# EAGLE board Kaya (EAGLE 8.5.0)
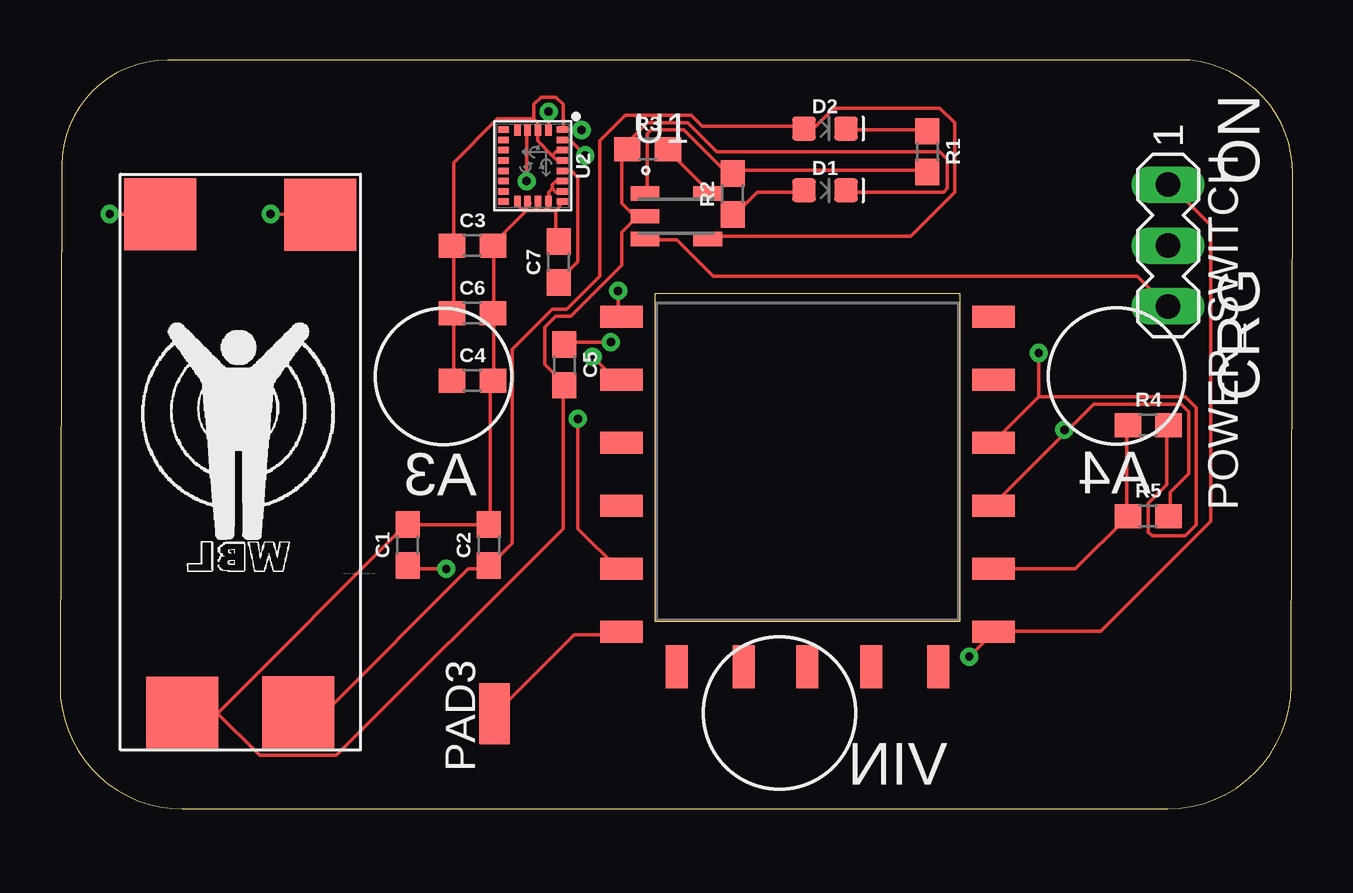
[diagram p0: board, top side]
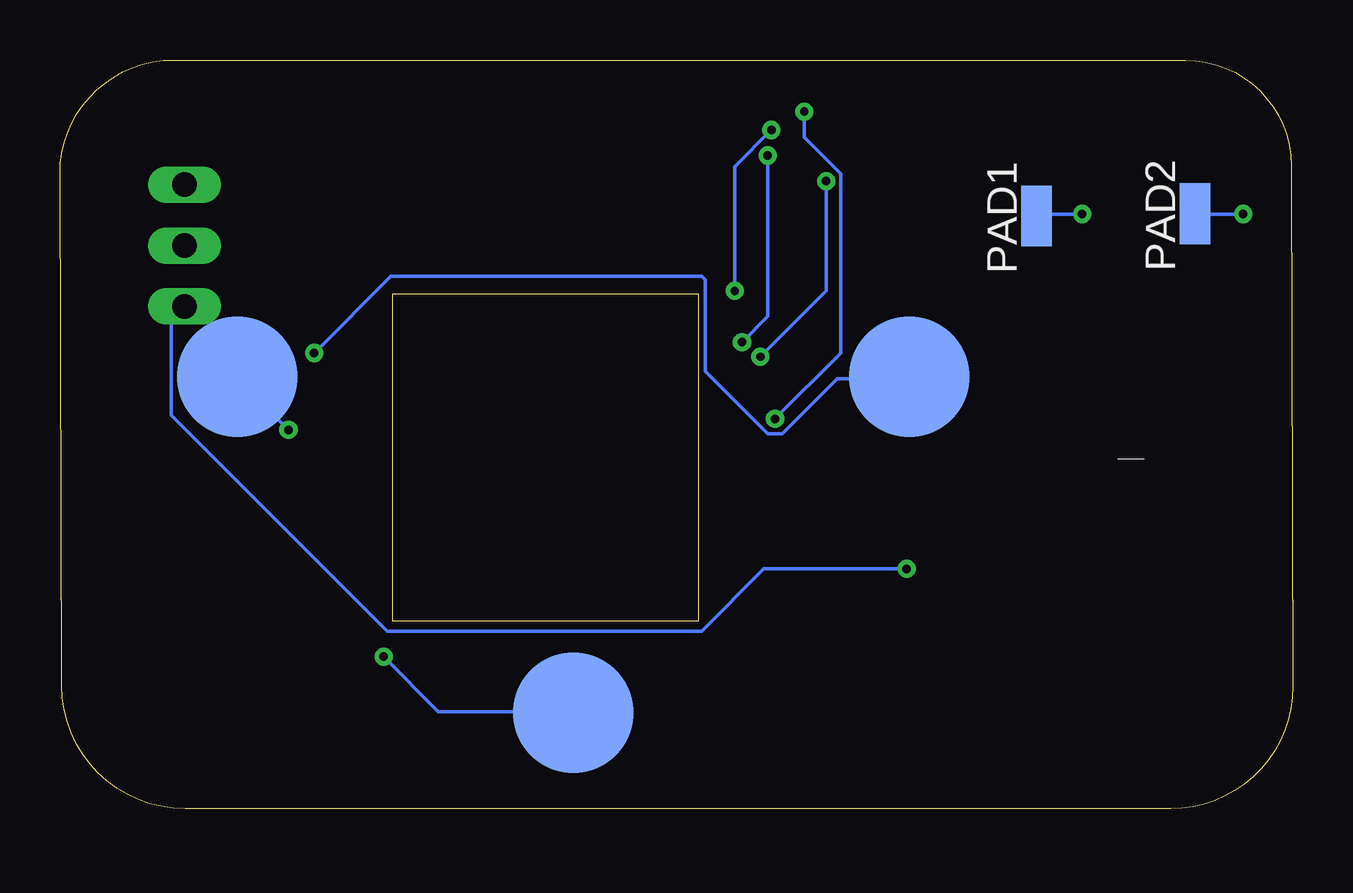
[diagram p1: board, bottom side, seen from below]

Size 51.37 x 31.2 mm. Coordinates in mm from the lower left corner, seen from the top.
Outline: 0.07,26.8 0,5.11 arc90 5.09,0 46.15,0 arc90 51.3,5.13 51.37,26.45 arc90 46.64,31.2 4.48,31.2 arc90 0.07,26.8
Copper layers (1*16): Top 0.035mm / dielectric 1.5mm / Bottom 0.035mm
Design rules "default": minimum track width 6mil, minimum drill 0.35mm, track to track 6mil, track to pad 6mil, pad to pad 6mil, via to via 6mil, smd to smd 6mil, copper to edge 40mil, drill to drill 6mil, minimum pad ring 10mil, minimum via ring 8mil, stop-mask expansion 4mil, vias tented up to drill 0mil, thermal gap 10mil
tKeepout: area 24.6,7.5 to 37.7,22
bKeepout: area 24.6,7.5 to 37.7,22
tRestrict: area 24.6,7.5 to 37.7,22
bRestrict: area 24.6,7.5 to 37.7,22
vRestrict: area 24.6,7.5 to 37.7,22
Milling: area 24.8,7.8 to 37.5,21.5

## Footprints (pad centres in the part's own frame; a part is rotated, then mirrored left to right if it is on the bottom)
0603 = smd 1.1 x 1: 1 -0.85,0; 2 0.85,0
LED-0603 = smd 1 x 1: A -0.877,0; C 0.877,0
SMD1,27-2,54 = smd 1.27 x 2.54: 1 0,0
MA03-1 = drill 1.016 long: 1 -2.54,0; 2 0,0; 3 2.54,0
SOT23-5 = smd 1.2 x 0.6: 1 -1.306,0.95; 2 -1.306,0; 3 -1.306,-0.95; 4 1.306,-0.95; 5 1.306,0.95
LGA-24-3.5X3 = smd 0.27 x 0.45: 1 -1.505,1.225; 6 -1.505,-1.225; 7 -1.075,-1.225; 8 -0.645,-1.225; 9 -0.215,-1.225; 10 0.215,-1.225; 11 0.645,-1.225; 12 1.075,-1.225; 13 1.505,-1.225; 18 1.505,1.225; 19 1.075,1.225; 20 0.645,1.225; 21 0.215,1.225; 22 -0.215,1.225; 23 -0.645,1.225; 24 -1.075,1.225 | smd 0.45 x 0.27: 2 -1.475,0.645; 3 -1.475,0.215; 4 -1.475,-0.215; 5 -1.475,-0.645; 14 1.475,-0.645; 15 1.475,-0.215; 16 1.475,0.215; 17 1.475,0.645
INDUCTIVE-CHARGE-5V = smd 3 x 3: IN_L -3.33,10.33; IN_R 3.33,10.32; OUT+ 2.42,-10.42; OUT- -2.41,-10.43
BLE-NANO-PKG = smd 1.778 x 0.914: A3 7.75,4.375; A4 7.75,1.75; GND$6 -7.75,-3.5; GND$8 7.75,-0.875; RXD -7.75,1.75; SCL -7.75,-0.875; SDA -7.75,7; SWCLK 7.75,9.625; SWDIO 7.75,7; TXD -7.75,4.375; VDD -7.75,9.625; VIN 7.75,-3.5 | smd 0.914 x 1.778: P06 2.65,-4.95; P07 5.45,-4.95; P15 0,-4.95; P28 -5.45,-4.95; P29 -2.65,-4.95
CONDUCTIVE-BUTTON = smd 5 x 5: 1 0,0

## Placement (x,y rotation side)
C1  4.7uF  [0603]  14.49,10.99 90 top
C2  4.7uF  [0603]  17.87,10.99 90 top
C3  10uF  [0603]  17.18,23.46 0 top
C4  0.1uF  [0603]  17.18,17.84 0 top
C5  0.1uF  [0603]  21.01,18.5 270 top
C6  0.1uF  [0603]  17.18,20.65 0 top
C7  10nF  [0603]  20.78,22.78 90 top
D1  GREEN  [LED-0603]  31.87,25.77 0 top
D2  RED  [LED-0603]  31.87,28.34 0 top
PAD1  WIREPADSMD1,27-254  [SMD1,27-2,54]  10.68,24.7 0 bottom
PAD2  WIREPADSMD1,27-254  [SMD1,27-2,54]  4.08,24.8 0 bottom
PAD3  WIREPADSMD1,27-254  [SMD1,27-2,54]  18.11,3.96 0 top
POWER_SWITCH  [MA03-1]  46.17,23.47 270 top
R1  1k  [0603]  36.13,27.38 270 top
R2  1k  [0603]  28.02,25.62 90 top
R3  10k  [0603]  24.48,27.49 0 top
R4  10k  [0603]  45.34,15.99 0 top
R5  10k  [0603]  45.34,12.2 0 top
U1  MCP73832T-2ACI/OT  [SOT23-5]  25.68,24.69 0 top
U2  LSM9DS1  [LGA-24-3.5X3]  19.7,26.8 270 top
U$1  INDUCTIVE-CHARGE-5V  [INDUCTIVE-CHARGE-5V]  7.51,14.44 0 top
U$2  BLE-NANO  [BLE-NANO-PKG]  31.14,10.87 0 top
U$3  CONDUCTIVE-BUTTON  [CONDUCTIVE-BUTTON]  15.98,18 180 bottom
U$4  CONDUCTIVE-BUTTON  [CONDUCTIVE-BUTTON]  43.98,18 0 bottom
U$5  CONDUCTIVE-BUTTON  [CONDUCTIVE-BUTTON]  29.98,4 0 bottom

## Library data of the parts
C1 C2 = SparkFun-Capacitors; PROD_ID: CAP-08280
C3 = SparkFun-Capacitors; PROD_ID: CAP-11015
C4-C6 = SparkFun-Capacitors; PROD_ID: CAP-00810
C7 = SparkFun-Capacitors; PROD_ID: CAP-00867
D1 = SparkFun-LED; PROD_ID: DIO-00821
D2 = SparkFun-LED; PROD_ID: DIO-00819
PAD1-PAD3 = wirepad
POWER_SWITCH = con-lstb; OC_FARNELL: unknown; OC_NEWARK: unknown
R1 R2 = SparkFun-Resistors; PROD_ID: RES-07856
R3-R5 = SparkFun-Resistors; PROD_ID: RES-00824
U1 = MCP73832T-2ACI_OT; AVAILABILITY: Unavailable; MF: Microchip; MP: MCP73832T-2ACI-OT; PACKAGE: SOT-23-5 Microchip; PRICE: None
U2 = SparkFun-Sensors; PROD_ID: IC-12536
U$1 U$3-U$5 = tex-tronics
U$2 = BLE-NANO

## Nets
GND: C1.2 C2.2 C3.2 C4.2 C5.2 C6.2 C7.2 D1.C R3.1 U1.2 U2.14 U2.15 U2.16 U2.17 U2.18 U2.19 U2.20 U$1.OUT-
N$1: R3.2 U1.5
N$2: C2.1 D2.A U1.4 U$1.OUT+
N$3: R4.1 R5.1 U$2.GND$8
N$4: R4.2 U$2.A3 U$3.1
N$5: PAD3.1 U$2.GND$6
N$6: R5.2 U$2.A4 U$4.1
N$7: D2.C R1.1
N$8: R1.2 R2.2 U1.1
N$9: D1.A R2.1
N$10: PAD1.1 U$1.IN_R
N$11: PAD2.1 U$1.IN_L
N$12: C5.1 U2.24
N$14: C7.1 U2.21
N$16: U2.4 U$2.SDA
N$17: U2.2 U$2.SCL
VBAT: C1.1 POWER_SWITCH.3 U1.3
VDD: C3.1 C4.1 C6.1 U2.1 U2.3 U2.22 U2.23 U$2.VDD
VIN: POWER_SWITCH.1 U$2.VIN U$5.1

## Tracks (layer width: path | path; a pad name or v marks a point on that pad's centre or on a via)
GND
  Top 0.152: 24.02,24.63 23.41,24.02 23.41,22.65 21.27,20.51 20.66,20.51 20.21,20.06 20.21,18.53 20.97,17.77 C5.2 20.97,17.62 20.97,11.67 11.52,2.23 8.32,2.23 6.49,4.05 | 24.02,24.63 24.32,24.63 U1.2 24.02,24.63 | D1.C 32.86,25.69 36.82,25.69 36.97,25.85 36.97,27.07 36.67,27.37 27.37,27.37 26.15,28.59 24.47,28.59 23.71,27.83 23.71,27.52 R3.1 23.56,27.37 23.41,27.22 23.41,25.24 24.02,24.63 | 20.51,25.85 20.66,25.69 20.82,25.69 U2.19 | 20.51,25.85 20.51,26 20.66,26.15 20.82,26.15 U2.20 | 19.29,24.93 19.14,25.08 19.14,25.24 U2.14 | 19.29,24.93 19.6,25.24 U2.15 | 19.75,24.93 19.9,25.08 19.9,25.24 U2.16 | 19.29,24.93 19.44,24.93 | 19.44,24.93 19.75,24.93 | 20.21,24.93 20.36,25.08 20.36,25.24 U2.17 20.36,25.39 20.36,25.69 20.51,25.85 | 19.75,24.93 20.21,24.93 | 20.66,24.93 20.82,25.08 20.82,25.24 U2.18 | 20.21,24.93 20.66,24.93 | 19.44,24.93 18.07,23.56 C3.2 18.07,23.41 18.07,20.67 C6.2 18.07,20.51 18.07,17.92 C4.2 17.92,17.77 17.92,11.98 C2.2 17.77,11.83 14.57,11.83 C1.2 14.42,11.83 6.64,4.05 6.49,4.05 | 20.66,24.93 20.66,23.71 C7.2 | 6.49,4.05 5.12,4.05 U$1.OUT- 6.49,4.05
N$1
  Top 0.152: R3.2 25.39,27.37 27.06,25.69 U1.5
N$2
  Top 0.152: U1.4 27.06,23.87 35.45,23.87 37.28,25.69 37.28,28.59 36.67,29.2 32.25,29.2 31.48,28.44 31.03,28.44 D2.A 30.87,28.44 26.76,28.44 26.3,28.89 23.56,28.89 22.49,27.83 22.49,22.19 21.12,20.82 20.51,20.82 18.84,19.14 18.84,11.06 17.92,10.15 C2.1 17.77,10 17.01,10 11.06,4.05 10,4.05 U$1.OUT+
N$3
  Top 0.152: R4.1 44.44,15.94 44.44,12.28 R5.1 44.44,12.13 42.3,10 38.95,10 U$2.GND$8
N$4  (via drill 0.35)
  Top 0.152: 40.78,17.16 46.88,17.16 47.33,16.7 47.33,11.83 46.88,11.37 45.51,11.37 45.35,11.52 45.35,12.74 46.11,13.5 46.11,15.94 R4.2 | 40.78,17.16 38.95,15.33 U$2.A3 | 40.78,17.16 v40.78,18.99
  Bottom 0.152: v40.78,18.99 37.58,22.19 24.63,22.19 24.47,22.04 24.47,18.23 21.88,15.64 21.27,15.64 18.99,17.92 16.09,17.92 U$3.1
N$5
  Top 0.152: U$2.GND$6 23.25,7.25 21.43,7.25 18.23,4.05 PAD3.1
N$6  (via drill 0.35)
  Top 0.152: 42,15.79 38.95,12.74 U$2.A4 | 42,15.79 43.07,16.86 46.72,16.86 47.03,16.55 47.03,13.96 46.27,13.2 46.27,12.28 R5.2 | 42,15.79 v41.85,15.79
  Bottom 0.152: v41.85,15.79 43.98,17.92 U$4.1
N$7
  Top 0.152: D2.C 32.86,28.29 36.06,28.29 R1.1
N$8
  Top 0.152: U1.1 24.47,25.69 24.47,28.13 24.63,28.29 26,28.29 27.67,26.61 27.98,26.61 R2.2 28.13,26.61 36.06,26.61 R1.2
N$9
  Top 0.152: D1.A 30.87,25.69 29.05,25.69 28.13,24.78 R2.1
N$10  (via drill 0.35)
  Top 0.152: v8.78,24.78 10.76,24.78 U$1.IN_R
  Bottom 0.152: v8.78,24.78 10.61,24.78 PAD1.1
N$11  (via drill 0.35)
  Top 0.152: v2.07,24.78 4.05,24.78 U$1.IN_L
  Bottom 0.152: v2.07,24.78 4.05,24.78 PAD2.1
N$12  (via drill 0.35)
  Top 0.152: v21.88,27.22 21.27,27.83 20.97,27.83 U2.24 | v22.95,19.45 21.12,19.45 C5.1
  Bottom 0.152: v21.88,27.22 21.88,20.51 v22.95,19.45
N$14
  Top 0.152: U2.21 20.97,26.61 21.27,26.61 21.58,26.3 21.58,22.8 20.82,22.04 C7.1
N$16  (via drill 0.35)
  Top 0.152: v19.44,26.15 19.44,28.13 U2.4 | v22.19,18.84 23.25,17.77 U$2.SDA
  Bottom 0.152: v19.44,26.15 19.44,21.58 v22.19,18.84
N$17  (via drill 0.35)
  Top 0.152: v20.36,29.05 20.36,28.29 U2.2 | v21.58,16.25 21.58,11.67 23.25,10 U$2.SCL
  Bottom 0.152: v20.36,29.05 20.36,27.98 18.84,26.46 18.84,18.99 v21.58,16.25
VBAT  (via drill 0.35)
  Top 0.152: v16.09,10 14.57,10 C1.1 | U1.3 24.47,23.71 25.69,23.71 27.22,22.19 44.9,22.19 46.11,20.97 POWER_SWITCH.3
  Bottom 0.152: v16.09,10 22.04,10 24.63,7.41 37.73,7.41 46.72,16.4 46.72,20.36 46.27,20.82 POWER_SWITCH.3
VDD  (via drill 0.35)
  Top 0.152: 20.51,27.22 20.66,27.07 20.82,27.07 U2.22 | 20.51,27.22 20.66,27.37 20.82,27.37 U2.23 | 20.51,27.22 19.9,27.83 19.9,28.13 U2.3 19.9,28.29 19.9,28.59 19.75,28.74 | 19.75,28.74 19.75,29.35 20.05,29.66 20.66,29.66 20.97,29.35 20.97,28.44 U2.1 20.97,28.29 v21.73,28.29 | C4.1 16.4,17.92 16.4,20.51 C6.1 16.4,20.67 16.4,23.41 C3.1 16.4,23.56 16.4,26.91 18.23,28.74 19.75,28.74 | v23.25,21.58 23.25,20.51 U$2.VDD
  Bottom 0.152: v23.25,21.58 23.25,26.76 v21.73,28.29
VIN  (via drill 0.35)
  Top 0.152: POWER_SWITCH.1 46.27,26 47.94,24.32 47.94,11.98 43.37,7.41 38.95,7.41 U$2.VIN 38.8,7.25 v37.89,6.34
  Bottom 0.152: v37.89,6.34 35.6,4.05 30.11,4.05 U$5.1

## Text on the board
tPlace: C:/Users/mcons/Downloads/kTq6gCz2.bmp
tSilk: ON | CRG | A3 | A4 | VIN
200bmp: C:/Users/mcons/Downloads/kTq6gCz2.bmp